# Altium PCB mainBoard_PCB.PcbDoc
Units mm, origin at the board's own origin, x right, y up, seen from the top; angles counter-clockwise.
Board outline 37 x 35.15 mm, 2 copper layers (Top Layer, Bottom Layer); 83 components, 52 nets, 281 pads, 68 vias.
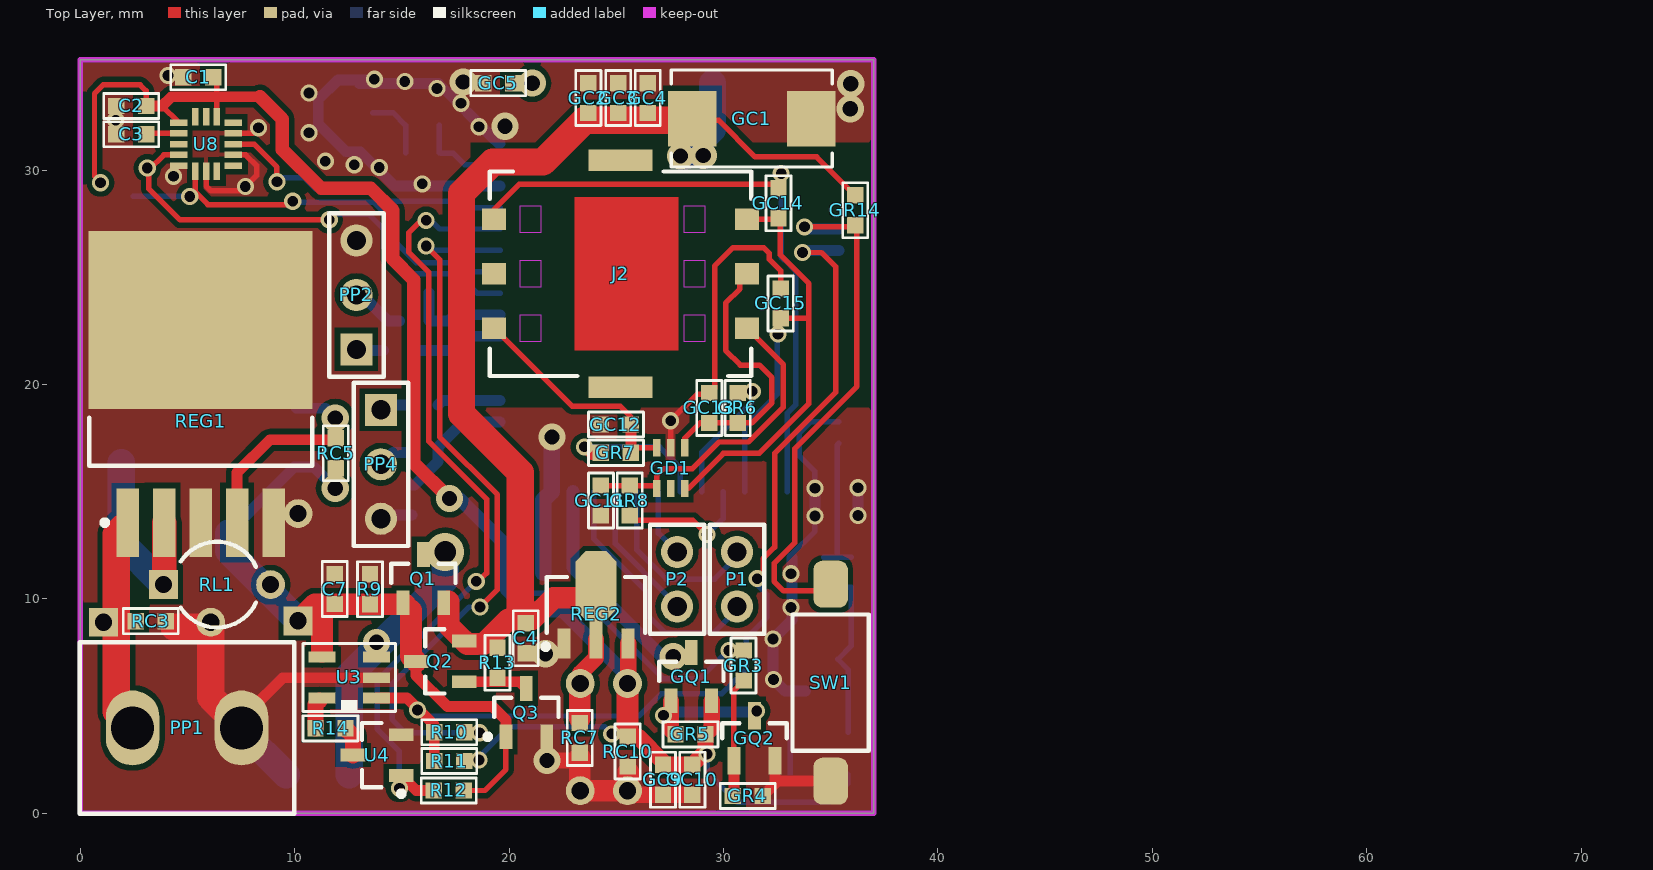
[diagram p0: Top Layer view]
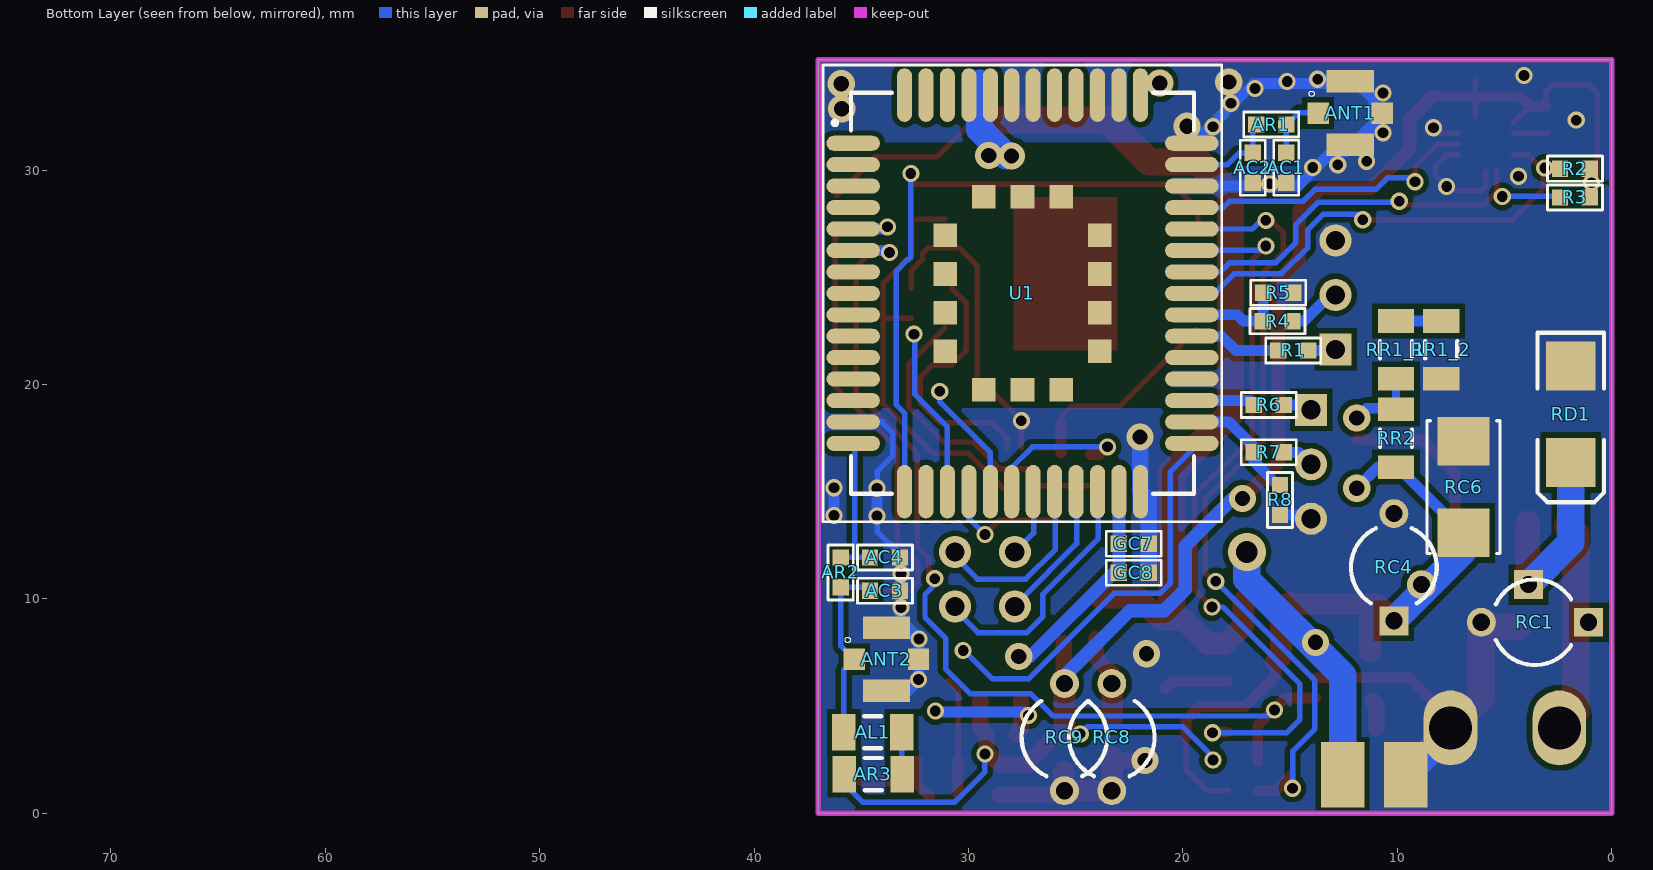
[diagram p1: Bottom Layer view, seen from below]

## Layer stack, top to bottom
Top Solder: solder mask 0.0102, Solder Resist, Dk 3.5
Top Layer: signal copper 0.0356
Dielectric 1: dielectric 0.32, FR-4, Dk 4.8
Bottom Layer: signal copper 0.0356
Bottom Solder: solder mask 0.0102, Solder Resist, Dk 3.5

## Board outline
0,0 37,0 37,35.154 0,35.154

## Design rules (kind name [scope] priority, off if disabled: settings)
Clearance "Keep-Out Layer" [OnLayer('Keep-Out Layer')] p1: gap=0
Clearance [All] p2: gap=0.254
ComponentClearance [All] p1 off: gap=0.254 collisioncheckmode=3 verticalgap=0.254 showdistances=FALSE
MinimumSolderMaskSliver [All] p1 off: minsoldermaskwidth=0.254
PolygonConnect [All] p1: connectstyle=Relief reliefconductorwidth=0.381 reliefentries=4 polygonreliefangle="90 Angle" airgapwidth=0.381
RoutingTopology [InNet('GND')] p1: topology=Daisy_Balanced
RoutingVias [All] p1: holewidth=0.711 width=1.27 viastyle="Through Hole" minholewidth=0.711 minwidth=1.27 maxholewidth=0.711 maxwidth=1.27
SilkToSolderMaskClearance [IsPad] p1 off: minsilkscreentomaskgap=0.127 clearancetoexposedcopper=TRUE
SolderMaskExpansion [All] p1: expansion=0.102
Width [All] p1: maxlimit=4 minlimit=0.254 preferedwidth=0.7
26 further rules are at their usual default settings.

## Components (designator, comment, footprint, x,y, rotation, side; value= is the part's Value field where it differs from the comment)
AC1 "NM" 0603R-1k 15.176,30.81 r270 bottom
AC2 "NM" 0603R-1k 16.739,30.81 r270 bottom
AC3 "NM" 0603R-1k 34.595,10.389 r180 bottom
AC4 "NM" 0603R-1k 34.595,11.938 r180 bottom
AL1 "47nH" C1206 34.468,3.785 r180 bottom
ANT1 "" MOLEX_73412-0110 12.192,32.664 r180 bottom
ANT2 "73412-0110" MOLEX_73412-0110 33.833,7.188 r180 bottom
AR1 "0" 0603R-1k 16.573,32.131 r180 bottom
AR2 "0" 0603R-1k 35.966,11.938 r270 bottom
AR3 "10" C1206 34.442,1.829 r180 bottom
C1 "4.7uF" 0603C-GENERIC 4.801,34.341 r0 top
C2 "100nF" 0603C-GENERIC 1.676,32.995 r0 top
C3 "100nF" 0603C-GENERIC 3.073,31.674 r180 top
C4 "10uF" 0603C-GENERIC 20.777,8.865 r270 top
C7 "10uF" 0603C-GENERIC 11.868,9.766 r90 top
GC1 "100uF; 16V" CAPCP7343X430N 31.318,32.41 r0 top
GC2 "100nF" 0603R-1k 23.698,32.664 r90 top
GC3 "33pF" 0603R-1k 25.095,32.664 r90 top
GC4 "10pF" 0603R-1k 26.467,32.664 r90 top
GC5 "2.2uF" 0603R-1k 20.193,34.061 r180 top
GC7 "10uF" 0603R-1k 22.987,12.573 r180 bottom
GC8 "100nF" 0603R-1k 22.987,11.227 r180 bottom
GC9 "10uF" 0603R-1k 27.178,2.261 r270 top
GC10 "100nF" 0603R-1k 28.55,2.261 r270 top
GC11 "33pF" 0603R-1k 24.282,13.894 r90 top
GC12 "33pF" 0603R-1k 24.282,18.136 r0 top
GC13 "33pF" 0603R-1k 29.337,19.609 r270 top
GC14 "100nF" 0603R-1k 32.563,27.762 r90 top
GC15 "33pF" 0603R-1k 32.664,23.089 r90 top
GD1 "SMF05C.TCT" SC70-6 27.534,16.104 r180 top
GQ1 "IRLML6402" Micro3_N 28.499,6.375 r90 top
GQ2 "PMBT3904" SOT23_N 31.445,3.505 r90 top
GR3 "4.7k" 0603R-1k 30.937,6.198 r90 top
GR4 "47k" 0603R-1k 30.429,0.813 r0 top
GR5 "10k" 0603R-1k 29.159,3.683 r180 top
GR6 "22" 0603R-1k 30.658,18.212 r90 top
GR7 "22" 0603R-1k 25.679,16.815 r180 top
GR8 "22" 0603R-1k 25.629,15.291 r270 top
GR14 "4.7k" 0603R-1k 36.144,28.829 r270 top
J2 "SIM8050-6-0-14-00-X_revF" SIM8050-6-0-14-00-X_revF 25.197,25.171 r90 top
P1 "GNSS-AUX" HDR1X2 30.632,12.192 r270 top
P2 "GNSS-AUX" HDR1X2 27.838,9.652 r90 top
PP1 "12v_Power" phoenix-2pin-200mil 4.978,3.988 r0 top
PP2 "SERIAL-PORT" HDR1X3 12.878,21.641 r90 top
PP4 "MC60-DEBUG" HDR1X3 14.021,18.821 r270 top
Q1 "IRLML6402" Micro3_N 16.002,10.947 r90 top
Q2 "IRLML6402" Micro3_N 16.789,7.087 r180 top
Q3 "N-channel MOSFET" SOT23 20.803,4.699 r0 top
R1 "1k" 0603R-1k 14.148,21.59 r0 bottom
R2 "10K" 0603R-1k 1.016,30.074 r0 bottom
R3 "10K" 0603R-1k 1.016,28.727 r0 bottom
R4 "1k" 0603R-1k 14.884,22.962 r0 bottom
R5 "5.6k" 0603R-1k 16.256,24.282 r180 bottom
R6 "1k" 0603R-1k 15.291,19.05 r0 bottom
R7 "1k" 0603R-1k 15.291,16.84 r0 bottom
R8 "5.6k" 0603R-1k 15.469,15.316 r270 bottom
R9 "100k" 0603R-1k 13.508,9.752 r90 top
R10 "2K" 0603R-1k 16.51,3.785 r0 top
R11 "800K" 0603R-1k 17.907,2.438 r180 top
R12 "1K" 0603R-1k 16.485,1.067 r0 top
R13 "100k" 0603R-1k 19.456,7.722 r270 top
R14 "10K" 0603R-1k 10.973,3.962 r0 top
RC1 "1000uF 16V" CAPR5-4X5#1 3.581,8.915 r0 bottom
RC3 "100nF" 0603R-1k 2.591,8.966 r0 top
RC4 "470 μF; 25 V" CAPR5-4X5#1 10.16,11.481 r90 bottom
RC5 "15nF" 0603R-1k 11.913,16.104 r90 top
RC6 "10uF; 25V" CAPCP6032X280N 6.909,15.215 r90 bottom
RC7 "100nF" 0603R-1k 23.292,4.216 r270 top
RC8 "10 μF; 16V" CAPR5-4X5#2 23.317,3.556 r270 bottom
RC9 "4.7 μF; 16V" CAPR5-4X5#2 25.527,3.556 r270 bottom
RC10 "100nF" 0603R-1k 25.527,3.581 r270 top
RD1 "SM5822" SMB 1.905,18.618 r270 bottom
REG1 "LM2596S-ADJ" TS5B_N 5.613,19.558 r90 top
REG2 "AIC1734-33XA" SOT89N 24.054,9.728 r90 top
RL1 "68uH 3.1A (47 33)" CAPR5-4X5#1 6.375,10.668 r0 top
RR1_1 "1k; 1%" C1206 10.058,21.615 r270 bottom
RR1_2 "1k; 1%" C1206 7.95,21.615 r90 bottom
RR2 "4.7k; 1%" C1206 10.058,17.501 r90 bottom
SW1 "" smd-switch 35.001,6.096 r0 top
U1 "MC60" XCVR_MC60 27.483,24.257 r180 bottom
U3 "charger" SOT23-5 13.818,5.385 r180 top
U4 "N-channel MOSFET" SOT23 13.843,2.718 r90 top
U8 "MMA8452Q" MMA8452Q 5.867,31.217 r0 top

## Footprints (in the part's own frame and the unit in brackets; to place one, negate y for a bottom-side part, rotate by r counter-clockwise, add the part's x,y. Pads: shape width x height; smd on the part's side, far side on the other; paste and mask are expansions set on the pad)
0603C-GENERIC [mil] "CAPACITOR 0603"
  rect 30x30 smd: 1(0,0) 2(55,0)
  silkscreen extent -23,-23 78,23, body extent -4,-15 59,15, height 19
0603R-1k [mil] "RESISTOR 0603"
  rect 30x30 smd: 1(0,0) 2(55,0)
  silkscreen extent -23,-23 78,23, body extent -4,-15 59,15, height 20
C1206 [mm] "Chip Capacitor, Body 3.2x1.6mm, IPC High Density"
  rect 1.1x1.7 smd: 1(-1.35,0) 2(1.35,0)
  silkscreen extent -0.4,-0.75 0.4,0.75, body extent -1.7,-0.9 1.7,0.9, height 1.3
CAPCP6032X280N [mil]
  rect 89x95 smd: 1(-84,0) 2(84,0)
  silkscreen extent -122,-67 122,67
CAPCP7343X430N [mil]
  rect 89x102 smd: 1(-109,0) 2(109,0)
  silkscreen extent -148,-89 148,89
CAPR5-4X5#1 [mm] "Capacitor; 2 Leads"
  rect 1.35x1.35 hole 0.8: 1(-2.5,0)
  round 1.35 hole 0.8: 2(2.5,0)
  silkscreen extent -1.69,-2 1.82,2
CAPR5-4X5#2 [mm] "Capacitor; 2 Leads"
  round 1.35 hole 0.8: 1(-2.5,0) 2(2.5,0)
  silkscreen extent -1.69,-2 1.82,2
HDR1X2 [mm] "Connector; Header; 2 Position"
  round 1.5 hole 0.9: 1(0,0) 2(2.54,0)
  silkscreen extent -1.27,-1.27 3.81,1.27
HDR1X3 [mm] "Connector; Header; 3 Position"
  rect 1.5x1.5 hole 0.9: 1(0,0)
  round 1.5 hole 0.9: 2(2.54,0) 3(5.08,0)
  silkscreen extent -1.27,-1.27 6.35,1.27
Micro3_N [mm] "SOT23, 3-Leads, Body 2.9x1.3mm, Pitch 0.95mm, Lead Span 2.3mm, IPC Medium Density"
  rect 1.15x0.6 smd: 1(-1.125,0.95) 2(-1.125,-0.95) 3(1.125,0)
  silkscreen extent -0.2,-1.5 0.7,1.5, body extent -0.7,-1.5 0.7,1.5, height 1.12
MMA8452Q [mm]
  rect 0.813x0.305 smd mask+0.05: 1(-1.275,1) 2(-1.275,0.5) 3(-1.275,0) 4(-1.275,-0.5) 5(-1.275,-1) 9(1.275,-1) 10(1.275,-0.5) 11(1.275,0) 12(1.275,0.5) 13(1.275,1)
  rect 0.305x0.813 smd mask+0.05: 6(-0.5,-1.275) 7(0,-1.275) 8(0.5,-1.275) 14(0.5,1.275) 15(0,1.275) 16(-0.5,1.275)
MOLEX_73412-0110 [mm]
  rect 1x1 smd: 1(-1.5,0) 3(1.5,0)
  rect 2.2x1.05 smd: 2(0,-1.475) 4(0,1.475)
  silkscreen extent -1.93,0.77 -1.67,1.03
phoenix-2pin-200mil [mm]
  oval 2.5x3.5 hole 2: 1(-2.54,0) 2(2.54,0)
  silkscreen extent -5,-4 5,4
SC70-6 [mm]
  rect 0.35x0.8 smd: 1(-0.65,-0.95) 2(0,-0.95) 3(0.65,-0.95) 4(0.65,0.95) 5(0,0.95) 6(-0.65,0.95)
SIM8050-6-0-14-00-X_revF [mm] "Nano SIM Card Connector, Push-Pull Type, 6 Pin, SMT, Profile 1.35mm"
  rect 1x1.1 smd: C1(2.54,-5.9) C2(0,-5.9) C3(-2.54,-5.9) C5(2.54,5.9) C6(0,5.9) C7(-2.54,5.9)
  rect 1x3 smd: C4(5.3,0) C8(-5.3,0)
  Top Layer region: -3.575,-2.7 3.575,-2.7 3.575,2.15 -3.575,2.15
  Top Layer keep-out region: 1.94,-3.95 3.14,-3.95 3.14,-2.95 1.94,-2.95
  Top Layer keep-out region: -0.6,-3.95 0.6,-3.95 0.6,-2.95 -0.6,-2.95
  Top Layer keep-out region: -3.14,-3.95 -1.94,-3.95 -1.94,-2.95 -3.14,-2.95
  Top Layer keep-out region: -3.14,3.7 -1.94,3.7 -1.94,4.7 -3.14,4.7
  Top Layer keep-out region: -0.6,3.7 0.6,3.7 0.6,4.7 -0.6,4.7
  Top Layer keep-out region: 1.94,3.7 3.14,3.7 3.14,4.7 1.94,4.7
  silkscreen extent -4.77,-6.1 4.77,6.1, body extent -5.42,-6.1 5.42,6.1, height 1.34
SMB [mm] "DO-214-AA/SMB; 2 C-Bend Leads; Body 5.3 x 3.6 mm, inc. leads (LxW)"
  rect 2.3x2.3 smd: 1(-2.25,0) 2(2.25,0)
  silkscreen extent -3.8,-1.55 4.1,1.55
smd-switch [mm]
  rrect50% 1.6x2.19 smd: 1(0,4.595) 2(0,-4.595)
  silkscreen extent -1.78,-3.17 1.78,3.18, body extent -1.75,-4.98 1.75,4.98, height 4.42
SOT23 [mm]
  rect 0.6x1.15 smd: 1(-0.95,-1.125) 2(0.95,-1.125) 3(0,1.125)
  silkscreen extent -1.92,-1.25 1.5,0.7, body extent -1.5,-0.7 1.5,0.7, height 1.1
SOT23-5 [mil]
  rect 50x20 smd: 1(0,0) 2(0,-37) 3(0,-75) 4(100,-75) 5(100,0)
  silkscreen extent -35,-100 135,25, body extent 2,-95 98,20, height 52
SOT23_N [mm] "SOT23, 3-Leads, Body 2.9x1.3mm, Pitch 0.95mm, Lead Span 2.3mm, IPC Medium Density"
  rect 1.3x0.6 smd: 1(-1.05,0.95) 2(-1.05,-0.95) 3(1.05,0)
  silkscreen extent 0,-1.5 0.7,1.5, body extent -0.7,-1.5 0.7,1.5, height 1.1
SOT89N [mm] "SOT89, 3-Leads, Body 4.5x2.4 mm, Pitch 1.5mm, Lead Span 4.1mm, IPC Medium Density"
  rect 1.4x0.6 smd: 1(-1.8,1.5) 3(-1.8,-1.5)
  rect 1.8x0.6 smd: 2(-1.6,0)
  oct 3.2x1.9 smd: 2(0.9,0)
  silkscreen extent -2.07,-2.3 1.3,2.47, body extent -1.3,-2.3 1.3,2.3, height 1.6
TS5B_N [mm] "D2-PAK, 6-Leads, Body 8.6x10.2mm, Pitch 1.7mm, Lead Span 14.1mm, IPC Medium Density"
  rect 3.2x1.05 smd: 1(-6,3.4) 2(-6,1.7) 3(-6,0) 4(-6,-1.7) 5(-6,-3.4)
  rect 8.3x10.45 smd: 6(3.45,0)
  silkscreen extent -6.12,-5.2 -1.1,5.2, body extent -3.35,-5.2 6.05,5.2, height 4.65
XCVR_MC60 [mm]
  oval 2.5x0.7 smd: 1(-7.9,7) 2(-7.9,6) 3(-7.9,5) 4(-7.9,4) 5(-7.9,3) 6(-7.9,2) 7(-7.9,1) 8(-7.9,0) 9(-7.9,-1) 10(-7.9,-2) 11(-7.9,-3) 12(-7.9,-4) 13(-7.9,-5) 14(-7.9,-6) 15(-7.9,-7) 28(7.9,-7) 29(7.9,-6) 30(7.9,-5) 31(7.9,-4) 32(7.9,-3) 33(7.9,-2) 34(7.9,-1) 35(7.9,0) 36(7.9,1) 37(7.9,2) 38(7.9,3) 39(7.9,4) 40(7.9,5) 41(7.9,6) 42(7.9,7)
  oval 0.7x2.5 smd: 16(-5.5,-9.25) 17(-4.5,-9.25) 18(-3.5,-9.25) 19(-2.5,-9.25) 20(-1.5,-9.25) 21(-0.5,-9.25) 22(0.5,-9.25) 23(1.5,-9.25) 24(2.5,-9.25) 25(3.5,-9.25) 26(4.5,-9.25) 27(5.5,-9.25) 43(5.5,9.25) 44(4.5,9.25) 45(3.5,9.25) 46(2.5,9.25) 47(1.5,9.25) 48(0.5,9.25) 49(-0.5,9.25) 50(-1.5,9.25) 51(-2.5,9.25) 52(-3.5,9.25) 53(-4.5,9.25) 54(-5.5,9.25)
  rect 1.1x1.1 smd: 55(-3.6,2.7) 56(-3.6,0.9) 57(-3.6,-0.9) 58(-3.6,-2.7) 59(-1.8,-4.5) 60(0,-4.5) 61(1.8,-4.5) 62(3.6,-2.7) 63(3.6,-0.9) 64(3.6,0.9) 65(3.6,2.7) 66(1.8,4.5) 67(0,4.5) 68(-1.8,4.5)
  silkscreen extent -9.3,-10.65 9.3,10.65

## Part data
AC1 AC2 AC3 AC4 GC2 GC3 GC4 GC5 GC7 GC8 GC9 GC10 GC11 GC12 GC13 GC14 GC15 RC3 RC7 RC10: library part Cap-Bipolar, "Bipolar Capacitor"
AL1 RL1: library part Inductor, "Inductor"
ANT1: library part 73412-0110, "50 Ohms, Microcoaxial RF, PCB Vertical Jack Receptacle, SMT, 1.25mm Mounted Height"
ANT2: "50 Ohms, Microcoaxial RF, PCB Vertical Jack Receptacle, SMT, 1.25mm Mounted Height"
AR1 AR2 AR3 GR3 GR4 GR5 GR6 GR7 GR8 GR14 R1 R4 R5 R6 R7 R8 R9 R13: library part Resistor, "Resistor"
C1 C2 C3 C4 C7: library part 0603C-1NF-50V-X7R-KEM, "CAPACITOR 0603 CERAMIC"
GC1 RC5 RC6: library part Cap, "Capacitor"
GQ1 Q1 Q2: library part IRLML6401, "HEXFET Power MOSFET"
GQ2: "NPN Switching Transistor"
J2: "Nano SIM Card Connector, Push-Pull Type, 6 Pin, SMT, Profile 1.35mm"
P1 P2 PP1: library part "Header 2", "Header, 2-Pin"
PP2 PP4: library part "Header 3", "Header, 3-Pin"
Q3 U4: library part 2N7002, "NPN transistor"
R2 R3 R10 R11 R12 R14: library part 0603R-1K, "GENERIC RESISTOR 0603"
RC1: library part "Cap Pol1", "Polarized Capacitor (Radial)"
RC4: library part "WCAP-PSLC 10x12.4x4.5 875075361006", "WCAP-PSLC Aluminum Polymer Capacitors , 680 ?F; + / - 20%; 16 V , 10 x 12,4"
RC8: library part "WCAP-PSLP 5x5.8x1.4 875105359001", "WCAP-PSLP Aluminum Polymer Capacitors , 10 ?F; + / - 20%; 16 V , 5 x 5,8"
RC9: library part "WCAP-PSLP 5x5.8x1.4 875105359003", "WCAP-PSLP Aluminum Polymer Capacitors , 22 ?F; + / - 20%; 16 V , 5 x 5,8"
RD1: library part "D Schottky", "Schottky Diode"
REG1: "SIMPLE SWITCHER® Power Converter 150 KHz 3A Step-Down Voltage Regulator, 5-pin TO-263"
REG2: library part HT7530-1, "3.0V 100mA Low Power,  Low Dropout Voltage (LDO) Regulator"
RR1_1 RR1_2 RR2: library part Res1, "Resistor"
SW1: library part SW-PB-A-BLACK-SMD, "PUSHBUTTON SWITCH 6MM SMD"
U3: library part LTC4054-4.2, "Li-Ion Battery Charger"

## Free pads (board coordinates)
  round 0 on Mech16 paste+0 mask+0: 1(68.402,8.534) 1(71.45,11.84)
  rect 2.032x3.048 smd far side: 2(9.601,1.803) 2(12.548,1.803)

## Via types
v1: diameter 0.8, hole 0.5, Top Layer to Bottom Layer, 52 vias
v2: diameter 1.27, hole 0.711, Top Layer to Bottom Layer, 15 vias
v3: diameter 1.778, hole 1.016, Top Layer to Bottom Layer, 1 vias

## Nets (pads, with @x,y where several pads share a name; then routed paths per layer and width w, separated by ;. In a path a pad name is that pad's centre, name@x,y a point inside that pad or via, vN(x,y) a via of type N, cw(c..) or ccw(c..) an arc to the next point about the centre after c; other vN are vias at no path point)
CHARG_CTRL: R12.1 U1.38 U4.1 | length 36.2
  Top Layer w0.254: v1(16.129,27.661) 15.9,27.661 15.316,27.076 15.316,26.175 16.256,25.235 16.256,17.348 18.948,14.656 18.948,11.201 v1@18.567,10.82
  Top Layer w0.508: U4.1 15.669,1.067 R12.1
  Bottom Layer w0.254: v1(14.884,1.168) 14.884,2.896 13.843,3.937 13.843,6.198 v1(18.466,10.82) ; v1@16.307,27.711 16.761,27.257 U1.38
CHRG_IN: R10.1 R11.2 U1.6 U3.1 | length 45.7
  Top Layer w0.254: v1(31.572,10.947) 31.852,11.227 31.852,11.887 32.385,12.421 32.385,16.795 35.23,19.64 35.23,25.502 34.569,26.162 v1(33.68,26.162)
  Top Layer w0.508: U3.1 15.24,5.385 16.51,4.115 R11.2
  Bottom Layer w0.254: v1(15.723,4.826) 16.008,4.54 26.054,4.54 27.102,5.588 29.921,5.588 31.064,6.731 31.064,8.179 32.029,9.144 32.029,10.211 31.572,10.668 v1(31.572,10.947)
  Bottom Layer w0.508: v1(33.68,26.162) 33.775,26.257 U1.6
CHRG_OUT: R10.2 U1.37 | length 34.1
  Top Layer w0.254: v1(16.129,26.467) 16.764,25.832 16.764,17.559 19.456,14.866 19.456,10.439 v1(18.644,9.627)
  Top Layer w0.508: R10.2 v1@18.593,3.785
  Bottom Layer w0.254: v1@16.326,26.257 U1.37 ; v1(18.618,3.759) 15.164,3.759 14.543,4.38 14.543,6.034 18.136,9.627 v1(18.644,9.627)
GND: AC1.2 AC2.2 AC3.2 AC4.2 ANT1.2 ANT1.3 ANT1.4 ANT2.2 ANT2.3 ANT2.4 C1.1 C2.1 C3.2 C4.2 C7.2 GC1.2 GC2.2 GC3.2 GC4.2 GC5.2 GC7.2 GC8.2 GC9.2 GC10.2 GC11.1 GC12.1 GC13.1 GC15.2 GD1.2 GQ2.2 GR4.2 pad.2@9.601,1.803 PP1.2 PP2.3 PP4.3 Q3.2 R5.2 R8.2 R9.2 RC1.2 RC3.2 RC4.2 RC6.2 RC7.2 RC8.2 RC9.2 RC10.2 RD1.1 REG1.3 REG1.5 REG1.6 REG2.1 RR1_2.1 SW1.2 U1.14 U1.27 U1.31 U1.40 U1.42 U1.44 U1.45 U1.48 U1.49 U3.2 U4.2 U8.5 U8.7 U8.10 U8.12 | length 97.3
  Top Layer w0.254: U8.7 5.867,29.261 6.096,29.032 v1@7.391,29.032 ; U8.10 7.714,30.717 8.23,30.201 8.23,29.769 v1(7.696,29.235) ; U8.12 8.044,31.717 v1(8.306,31.979) ; GD1.2 v1(27.534,18.313) 28.778,19.558 GC13.1@29.337,19.558 ; GC13.1@29.591,19.837 29.591,25.527 30.455,26.391 31.877,26.391 32.131,26.137 32.131,25.85 32.664,25.317 GC15.2
  Top Layer w0.508: PP1.2@7.988,4.864 9.449,6.325 U3.2 ; GR4.2 32.395,1.382 GQ2.2 ; 32.514,1.501 SW1.2
  Top Layer w0.762: v2(21.768,2.464) RC7.2@23.139,2.464 ; RC9.2 25.719,0.864 GC9.2 GC10.2
  Top Layer w1.016: RC8.2@23.292,1.081 RC7.2@23.292,2.616 ; RC8.2 RC9.2 ; RC9.2@25.552,1.081 RC10.2@25.552,1.93
  Top Layer w1.27: 4.369,8.687 5.853,8.687 RC1.2 6.081,5.425 PP1.2
  Bottom Layer w0.254: AC4.2 33.198,12.09 34.265,13.157 v1(34.265,13.868) ; v1(34.265,15.164) 34.265,15.951 33.528,16.688 33.528,17.729 34.056,18.257 U1.14
  Bottom Layer w0.508: ANT1.4@13.005,34.061 13.03,34.036 15.138,34.036 16.713,34.036 16.789,33.96 19.253,31.496 19.492,31.257 U1.42 ; v1@13.691,34.214 12.014,34.214 11.1,33.299 11.1,32.156 12.395,30.861 13.056,30.861 14.66,29.257 U1.40 ; PP4.3@14.199,13.919 R8.2 ; AC4.2 AC3.2 33.198,9.017 v1(32.309,8.128) 32.309,6.274 v1(32.334,6.248) 32.869,5.713 ANT2.2 ; v1(34.265,13.868) v1(34.265,15.164) ; v1(36.271,13.894) v1(36.271,15.189)
  Bottom Layer w0.762: GC8.2 GC7.2 21.59,14.614 U1.27 v2@21.983,17.475
  Bottom Layer w1.27: PP1.2@7.518,3.886 pad.2@9.601,1.803
  other v1: 33.147,9.601 33.147,11.176 15.951,29.362 4.343,29.718 13.945,30.124 12.776,30.251 11.43,30.414 10.668,31.75 18.593,32.029 1.651,32.334 17.755,33.122 10.668,33.604 16.637,33.807 15.138,34.138 13.716,34.239 4.089,34.417
  other v2: 21.692,7.442 21.996,17.551 19.812,32.055 35.916,32.868 35.941,34.036 17.858,34.112
INT1: U1.39 U8.11 | length 14.2
  Top Layer w0.254: U8.11 8.103,31.217 9.169,30.15 v1(9.169,29.464)
  Bottom Layer w0.254: v1(9.169,29.464) 9.347,29.642 10.465,29.642 10.998,29.108 13.843,29.108 14.402,28.55 17.831,28.55 18.123,28.257 U1.39
INT2: U8.9
NetAC1_1: AC1.1 ANT1.1 AR1.2 | length 3.1
  Bottom Layer w0.254: ANT1.1@13.64,32.69 14.58,32.69 15.176,32.093 AC1.1
NetAC2_1: AC2.1 AR1.1 U1.41 | length 4.3
  Bottom Layer w0.254: AC2.1 AR1.1@16.739,32.106 ; AC2.1@16.815,30.785 17.399,30.785 17.927,30.257 U1.41
NetAC3_1: AC3.1 AL1.1 ANT2.1 AR2.2 | length 8.4
  Bottom Layer w0.254: AC3.1@34.823,10.541 AR2.2 35.966,7.822 ANT2.1 35.818,6.703 AL1.1
NetAC4_1: AC4.1 AR2.1 U1.15 | length 6.6
  Bottom Layer w0.254: AC4.1@34.671,11.938 AR2.1 ; 35.306,11.989 35.306,17.18 U1.15
NetAL1_2: AL1.2 AR3.2 | length 2
  Bottom Layer w0.254: AR3.2@33.118,1.753 AL1.2
NetC3_1: C3.1 U8.2 | length 1.6
  Top Layer w0.254: C3.1@2.98,31.717 U8.2
NetGC11_2: GC11.2 GD1.4 GR8.1 J2.C3 | length 14.5
  Top Layer w0.254: GC11.2 GR8.1 GD1.4@26.746,15.291 ; GD1.4@26.884,15.291 26.884,15.758 27.203,16.078 28.55,16.078 29.794,17.323 31.166,17.323 32.791,18.948 32.791,20.937 J2.C3
NetGC12_2: GC12.2 GD1.3 GR7.1 J2.C7 | length 10.6
  Top Layer w0.254: J2.C7@19.367,22.568 22.945,18.99 25.18,18.99 25.679,18.491 GC12.2 ; GR7.1@25.923,17.054 GD1.3
  Top Layer w0.508: GR7.1 GC12.2
NetGC13_2: GC13.2 GD1.1 GR6.1 J2.C2 | length 12.9
  Top Layer w0.254: GD1.1 28.184,17.49 28.905,18.212 GR6.1 31.318,18.212 32.258,19.152 32.258,20.32 31.674,20.904 30.785,20.904 30.099,21.59 30.099,23.8 30.759,24.46 J2.C2@30.759,25.171
NetGC14_1: GC14.1 GC15.1 GD1.6 J2.C1 U1.18 | length 27.1
  Top Layer w0.254: GD1.6 28.362,15.154 29.997,16.789 31.661,16.789 33.985,19.114 33.985,24.714 32.639,26.06 GC14.1@32.639,27.711 ; J2.C1 GC14.1@32.41,27.711 ; GC15.1 33.96,23.089
  Bottom Layer w0.254: U1.18 30.983,18.029 32.512,19.558 v1@32.512,22.301
  other v1: 32.537,22.352
NetGC14_2: GC14.2 J2.C5 U1.16 | length 29.5
  Top Layer w0.254: J2.C5 19.297,28.161 20.472,29.337 GC14.2@32.563,29.337
  Bottom Layer w0.254: v1(32.69,29.845) 32.69,25.933 32.798,25.825 32.835,25.825 33.376,25.285 33.376,19.061 32.983,18.669 U1.16
NetGQ1_1: GQ1.1 GQ2.3 GR5.2 | length 6.1
  Top Layer w0.762: GQ1.1 27.549,3.896 GR5.2
  Bottom Layer w0.508: v1(27.203,4.572) 27.356,4.724 v1@31.572,4.724
  other v1: 31.547,4.775
NetGQ2_1: GQ2.1 GR3.1 GR4.1 | length 5.2
  Top Layer w0.254: GQ2.1@30.48,2.743 30.48,5.74 GR3.1
  Top Layer w0.508: GR4.1@30.495,0.879 GQ2.1
NetGR3_2: GR3.2 U1.28 | length 18.7
  Bottom Layer w0.254: U1.28 19.583,16.942 20.599,15.926 20.599,10.719 21.057,10.262 23.21,10.262 27.198,6.274 28.88,6.274 v1@30.023,7.417
  other v1: 30.251,7.595
NetGR6_2: GR6.2 U1.20 | length 5.7
  Bottom Layer w0.254: U1.20 28.983,16.842 31.344,19.202 v1(31.344,19.685)
NetGR7_2: GR7.2 U1.21 | length 6.9
  Top Layer w0.508: v1(23.52,17.094) 23.876,16.739 GR7.2@24.308,16.739
  Bottom Layer w0.254: v1(23.52,17.094) 27.026,17.094 27.983,16.137 U1.21
NetGR8_2: GR8.2 U1.19 | length 6
  Top Layer w0.254: GR8.2@25.857,13.665 28.575,13.665 v1(29.235,13.005)
  Bottom Layer w0.254: v1(29.235,13.005) 29.983,13.752 U1.19
NetGR14_2: GR14.2 SW1.1 U1.5 | length 25.2
  Top Layer w0.254: v1(33.782,27.356) 36.22,27.356 36.22,19.912 33.325,17.016 33.325,12.624 32.366,11.665 32.366,10.814 32.798,10.382 34.692,10.382 SW1.1
  Bottom Layer w0.508: v1(33.782,27.356) 33.881,27.257 U1.5
NetP1_1: P1.1 U1.23 | length 8.7
  Bottom Layer w0.254: U1.23@25.957,15.007 25.957,12.295 27.33,10.922 29.591,10.922 P1.1@30.861,12.192
NetP1_2: P1.2 U1.25 | length 11.7
  Bottom Layer w0.254: U1.25@23.957,15.007 23.957,12.796 26.543,10.211 26.543,9.169 27.28,8.433 29.566,8.433 P1.2@30.632,9.5
NetP2_1: P2.1 U1.24 | length 6.6
  Bottom Layer w0.254: U1.24@24.957,15.007 24.957,12.577 27.552,9.982 P2.1@27.831,9.982 ; P2.1@27.831,9.652 P2.1@28.067,9.652
NetP2_2: P2.2 U1.22 | length 3.3
  Bottom Layer w0.254: U1.22@26.957,15.007 26.957,13.073 P2.2@27.953,12.078
NetPP2_1: PP2.1 R1.1 | length 1
  Bottom Layer w0.508: PP2.1@13.106,21.59 R1.1
NetPP2_2: PP2.2 R4.1 | length 2.5
  Bottom Layer w0.508: PP2.2 13.132,24.181 14.351,22.962 R4.1
NetPP4_1: PP4.1 R6.1 | length 1
  Bottom Layer w0.508: PP4.1@14.3,19.05 R6.1
NetPP4_2: PP4.2 R7.1 | length 1.5
  Bottom Layer w0.508: PP4.2 14.58,16.84 R7.1
NetQ2_1: Q2.1 Q3.3 R13.2 | length 3
  Top Layer w0.508: Q2.1 20.49,6.137 Q3.3
NetR1_2: R1.2 U1.33 | length 4.3
  Bottom Layer w0.508: R1.2 17.526,21.59 18.193,22.257 U1.33
NetR4_2: R4.2 R5.1 U1.34 | length 4.7
  Bottom Layer w0.508: R4.2@16.256,22.987 R5.1 ; R4.2 17.17,22.962 17.466,23.257 U1.34
NetR6_2: R6.2 U1.30 | length 3
  Bottom Layer w0.508: R6.2 16.895,19.257 U1.30
NetR7_2: R7.2 R8.1 U1.29 | length 5.7
  Bottom Layer w0.508: R8.1 15.596,15.316 16.688,16.408 R7.2 16.688,17.094 17.851,18.257 U1.29
NetR14_1: R14.1 U3.5 | length 1.4
  Top Layer w0.762: R14.1 10.973,5.08 U3.5@11.151,5.258
NetR14_2: R14.2 U4.3 | length 1.4
  Top Layer w0.762: R14.2 12.718,3.614 U4.3
NetRC5_2: RC5.2 REG1.4 RR1_1.2 RR2.2 | length 11
  Top Layer w0.508: REG1.4 7.313,15.899 8.839,17.424 RC5.2@11.913,17.424
  Bottom Layer w0.381: RR2.2 RR1_1.2
  Bottom Layer w0.508: RR2.2@10.084,18.898 11.43,18.898 v2(11.887,18.44)
NetRD1_2: RD1.2 REG1.2 RL1.1 | length 9.4
  Top Layer w1.143: RL1.1@3.913,10.706 REG1.2
  Bottom Layer w1.27: RD1.2 1.905,12.638 RL1.1
NetRR1_1_1: RR1_1.1 RR1_2.2 | length 2.1
  Bottom Layer w0.508: RR1_2.2 RR1_1.1
NetU1_47: U1.47
SCL: R2.2 U1.35 U8.4 | length 21.7
  Top Layer w0.254: U8.4 3.894,30.717 3.2,30.023 3.2,29.134 4.648,27.686 v1(11.608,27.686)
  Bottom Layer w0.254: v1(11.608,27.686) 11.862,27.94 13.462,27.94 14.175,27.227 14.175,26.389 15.392,25.171 17.602,25.171 18.517,24.257 U1.35
  other v1: 3.124,30.099
SDA: R3.2 U1.36 U8.6 | length 20
  Top Layer w0.254: U8.6 5.367,28.973 5.944,28.397 9.754,28.397 v1(9.906,28.55)
  Bottom Layer w0.254: R3.2@2.464,28.778 v1(5.105,28.778) ; v1@9.906,28.497 13.693,28.497 14.732,27.457 14.732,26.619 15.672,25.679 17.813,25.679 17.838,25.654 17.856,25.654 18.253,25.257 U1.36
V3.3: AR3.1 C1.2 C2.2 GC9.1 GC10.1 GQ1.2 GR5.1 R2.1 R3.1 R11.1 RC9.1 RC10.1 REG2.3 U8.1 U8.14 | length 79.4
  Top Layer w0.254: v1@0.94,29.439 0.66,29.718 0.66,33.579 1.067,33.985 2.794,33.985 3.073,33.706 C2.2 ; 3.814,32.995 U8.1 ; U8.14 6.367,33.426 C1.2@6.367,34.171
  Top Layer w0.508: C2.2 3.814,32.995 4.246,33.426 6.367,33.426 8.382,33.426
  Top Layer w0.635: 8.382,33.426 9.423,32.385 9.423,30.963 11.233,29.153 13.545,29.153 14.58,28.118 14.58,25.857 15.545,24.892 15.545,16.358 v2(17.221,14.681)
  Top Layer w0.762: RC10.1 26.01,3.581 27.178,2.413 GC9.1 GC10.1 29.159,2.87 GR5.1 29.449,3.973 GQ1.2 ; RC9.1 25.554,6.083 REG2.3
  Top Layer w1.016: RC10.1@25.527,3.785 RC9.1
  Bottom Layer w0.254: v1@18.618,2.655 19.996,4.032 24.467,4.032 v1(24.79,3.708) ; v1(29.235,2.769) 29.235,1.93 30.658,0.508 34.925,0.508 35.792,1.375 AR3.1
  Bottom Layer w0.635: v2@17.678,14.681 19.888,12.471 19.888,10.442 20.882,9.449 22.479,9.449 25.527,6.401 RC9.1
  other v1: 18.593,2.489 0.94,29.413
V12: PP1.1 RC1.1 RC3.1 REG1.1 | length 9.9
  Top Layer w1.27: REG1.1@2.062,13.407 1.676,13.021 1.676,4.75 PP1.1
V_EXT: GC5.1 U1.43
  other v2: 21.082,34.061
V_GNSS: GC7.1 GC8.1 GQ1.3 U1.26 | length 9.9
  Bottom Layer w0.6: U1.26 22.983,11.46 27.127,7.315 v2(27.661,7.315)
VBAT: pad.2@12.548,1.803 Q1.3 U3.3 | length 12.2
  Bottom Layer w1.27: pad.2@12.548,1.803 12.548,6.437 17.018,10.908 v3(17.018,12.192)
  other v2: 13.818,7.976
VBUCK: C7.1 Q1.1 Q2.3 Q3.1 R9.1 R12.2 RC4.1 RC5.1 RC6.1 RL1.2 RR2.1 U3.4 | length 32.9
  Top Layer w0.254: R12.2 18.872,1.067 19.853,2.047 Q3.1
  Top Layer w0.508: Q2.3 15.664,6.434 17.12,4.978 19.228,4.978 19.853,4.354 Q3.1
  Top Layer w1.016: RC4.1 10.931,9.752 R9.1 Q1.1@15.134,9.752 ; 11.278,7.544 11.278,9.703 ; Q1.1 15.418,9.457 15.418,7.333 Q2.3
  Bottom Layer w0.508: RC6.1 9.978,16.151 RR2.1 10.9,16.151 v2(11.887,15.164)
  Bottom Layer w1.27: RC6.1 6.909,12.232 RC4.1
VCC: C4.1 GC1.1 GC2.1 GC3.1 GC4.1 GR14.1 Q1.2 Q2.2 R13.1 RC7.1 RC8.1 REG2.2 U1.50 U1.51 | length 58.8
  Top Layer w0.254: GC1.1@28.956,32.334 29.772,32.334 31.481,30.626 34.347,30.626 GR14.1
  Top Layer w0.762: RC8.1@23.317,6.031 RC8.1 23.317,6.528 24.054,7.264 REG2.2@24.054,8.128
  Top Layer w1.016: Q1.2@17.17,9.881 17.17,8.781 Q2.2 18.052,7.899 18.821,7.899 19.964,9.042 21.057,9.042 22.073,10.058 REG2.2@23.851,10.058 ; RC7.1@23.292,4.42 RC8.1@23.292,6.005
  Top Layer w1.27: 20.523,9.398 20.523,15.9 17.78,18.644 17.78,28.931 19.228,30.378 21.565,30.378 23.52,32.334 GC1.1@28.956,32.334
  Bottom Layer w1.27: v2@28.245,30.658 29.489,31.902 29.489,34.061
  other v2: 27.991,30.658 29.058,30.683
pads on no net: GD1.5 J2.C4 J2.C6 J2.C8 U1.1 U1.2 U1.3 U1.4 U1.7 U1.8 U1.9 U1.10 U1.11 U1.12 U1.13 U1.17 U1.32 U1.46 U1.52 U1.53 U1.54 U1.55 U1.56 U1.57 U1.58 U1.59 U1.60 U1.61 U1.62 U1.63 U1.64 U1.65 U1.66 U1.67 U1.68 U8.3 U8.8 U8.13 U8.15 U8.16

## Polygon pours and split planes (outlines as drawn)
GND on Top Layer "Top Layer-GND" (solid, pour order 10): 0,35.154 37,35.154 37,0 0,0
GND on Bottom Layer "Bottom Layer-GND" (solid, pour order 8): 0,35.154 37,35.154 37,0 0,0

## Keep-outs
Keep-Out Layer:
  the board outline again, w0.254

## Other copper
Top Layer:
  pour cut-out: 18.183,18.923 36.783,18.923 36.783,31.296 18.183,31.296
Bottom Layer:
  pour cut-out: 20.523,18.898 36.783,18.898 36.783,31.296 20.523,31.296